# Altium PCB wisp5-form-factor-dipole.PcbDoc
Units mil, origin at the board's own origin, x right, y up, seen from the top; angles counter-clockwise.
Board outline 725 x 5829.89 mil, 4 copper layers (Top Layer, Mid-Layer 1, Mid-Layer 2, Bottom Layer); 43 components, 41 nets, 173 pads, 37 vias.
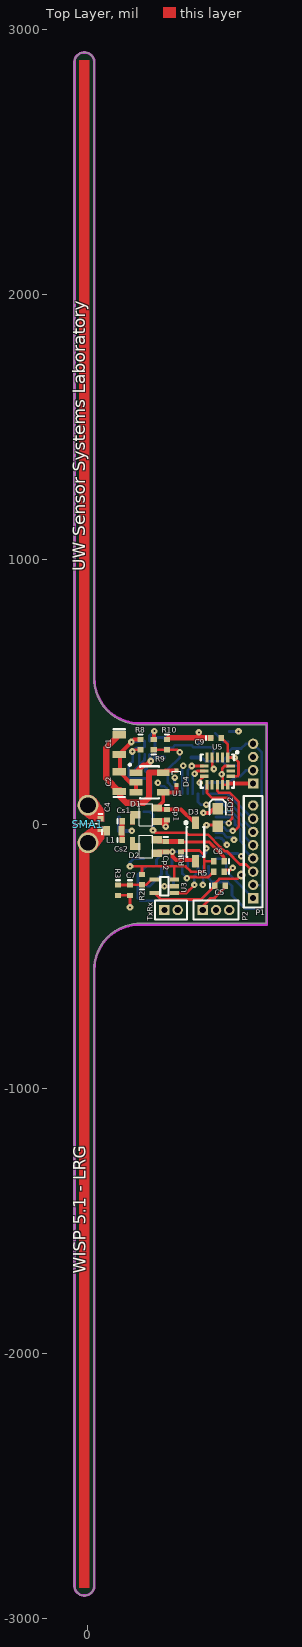
[diagram p0: Top Layer view]
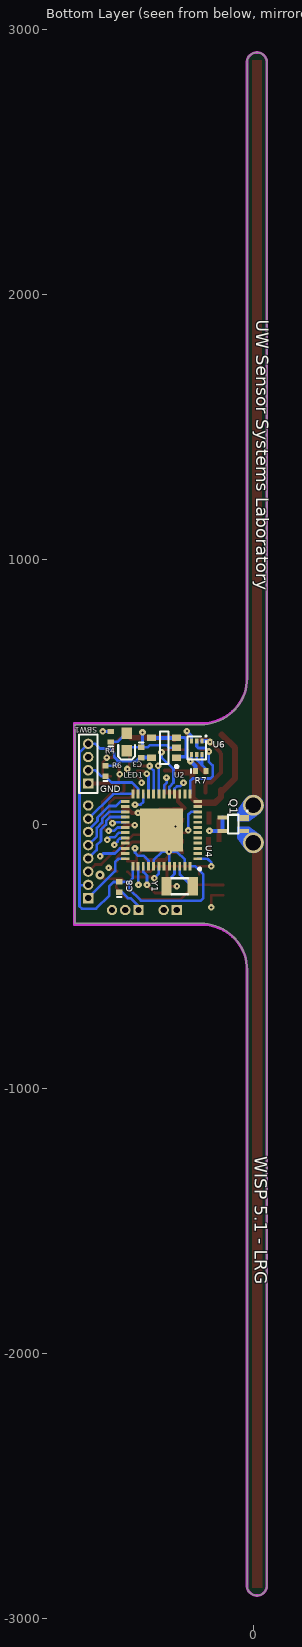
[diagram p1: Bottom Layer view, seen from below]
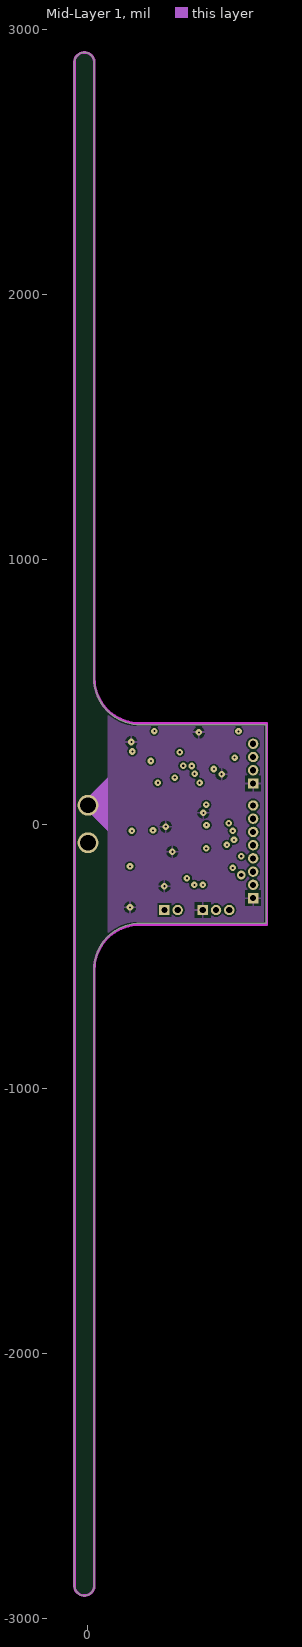
[diagram p2: Mid-Layer 1]
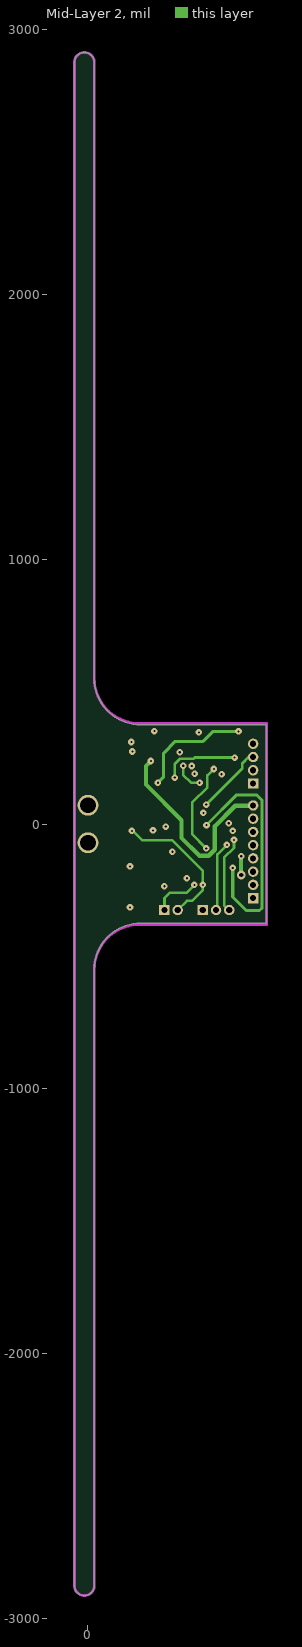
[diagram p3: Mid-Layer 2]

## Layer stack, top to bottom
Top Layer: signal copper 1.4
Dielectric: core 12.6, FR-4, Dk 4.8
Mid-Layer 1: signal copper 1.4
Dielectric: prepreg 12.6, FR-4, Dk 4.8
Mid-Layer 2: signal copper 1.4
Dielectric: core 12.6, FR-4, Dk 4.8
Bottom Layer: signal copper 1.4

## Board outline
-50,-2875 -50,2875 cw(c-12.5,2877.5) 25,2875 25,550 ccw(c200,550) 200,375 675,375 675,-375 200,-375 ccw(c200,-550) 25,-550 25,-2875 cw(c-12.5,-2877.5)

## Design rules (kind name [scope] priority, off if disabled: settings)
Clearance "Clearance~Sunstone Circuits" [All] p1: gap=6 // Sunstone Circuits Minimum Clearance Rule (MLB~4&6 Layer Designs)
HoleSize "HoleSize~Sunstone Circuits" [All] p1: absolutevalues=TRUE maxlimit=251 minlimit=8 maxpercent=80.000 minpercent=20.000 // Sunstone Circuits Hole Size Rule (MLB~4&6 Layer Designs)
HoleSize Testpoint [All] p2: absolutevalues=TRUE maxlimit=100 minlimit=1 maxpercent=80.000 minpercent=20.000
HoleSize TestPointUsage [All] p3: absolutevalues=TRUE maxlimit=100 minlimit=1 maxpercent=80.000 minpercent=20.000
MinimumAnnularRing "MinimumAnnularRing~Sunstone Circuits" [All] p1: minimumring=7 // Sunstone Circuits Minimum Annular Ring (MLB~4&6 Layer Designs)
MinimumSolderMaskSliver [All] p1 off: minsoldermaskwidth=2
PlaneClearance "PlaneClearance~Sunstone Circuits" [All] p1: clearance=12 // Sunstone Circuits Power Plane Clearance Rule (MLB~4&6 Layer Designs)
PlaneConnect "PlaneConnect~Sunstone Circuits" [All] p1: planeconnectstyle=Relief reliefexpansion=10 reliefentries=4 reliefconductorwidth=8 reliefairgap=10 // Sunstone Circuits Power Plane Connect Rule (MLB~4&6 Layer Designs)
PolygonConnect "PolygonConnect~Sunstone Circuits" [All] p1: connectstyle=Relief reliefconductorwidth=8 reliefentries=4 polygonreliefangle="90 Angle" airgapwidth=10 // Sunstone Circuits Polygon Connect Style (MLB~4&6 Layer Designs)
RoutingVias "RoutingVias~Sunstone Circuits" [All] p1: holewidth=16 width=30 viastyle="Through Hole" minholewidth=8 minwidth=24 maxholewidth=20 maxwidth=40 // Sunstone Circuits Routing Vias Rule (MLB~4&6 Layer Designs)
ShortCircuit "ShortCircuit~Sunstone Circuits" [All] p1: allowed=FALSE // Sunstone Circuits Short Circuit Rule~Do Not Allow (MLB~4&6 Layer Designs)
SilkToSilkClearance [All] p1 off: silktosilkclearance=10
SilkToSolderMaskClearance [IsPad] p1 off: minsilkscreentomaskgap=10 clearancetoexposedcopper=TRUE
SolderMaskExpansion "SolderMaskExpansion~Sunstone Circuits" [All] p1: expansion=3 // Sunstone Circuits Solder Mask Expansion Rule (MLB~4&6 Layer Designs)
ViasUnderSMD "ViasUnderSMD~Sunstone Circuits" [All] p1: allowed=FALSE // Sunstone Circuits Vias Under SMD~Do Not Allow (MLB~4&6 Layer Designs)
Width "Width~Sunstone Circuits" [All] p1: maxlimit=100 minlimit=6 preferedwidth=10 // Sunstone Circuits Minimum Width Rule (MLB~4&6 Layer Designs)
21 further rules are at their usual default settings.

## Classes and differential pairs
component class wisp-5-main: P1 P2
component class U_wisp-5-peripherals: C9 R7 R8 R9 R10 U5 U6
component class U_wisp-5-mcu: C8 LED1 LED2 R4 R5 R6 SBW1 TxRx U4 Y1
component class U_wisp-5-afe: 20 C1 C2 C3 C4 C5 C6 C7 Cp1 Cp2 Cs1 Cs2 D1 D2 D3 D4 L1 Q1 R1 R2 R3 SMA1 U1 U2 U3

## Components (designator, comment, footprint, x,y, rotation, side; value= is the part's Value field where it differs from the comment)
C1 "DNP" 0805 120,300 r270 top
C2 "Cap" 0805 120,160 r90 top
C3 "Cap" 0402 425,270 r270 bottom
C4 "Cap" 0402 48,0 r270 top
C5 "Cap" 0402 500,-233 r0 top
C6 "Cap" 0402 496,-141 r180 top
C7 "Cap" 0402 160,-250 r270 top
C8 "Cap" 0402 508,-238 r90 bottom
C9 "Cap" 0402 485,325 r0 top
Cp1 "Cap" 0402 300,35 r270 top
Cp2 "Cap" 0402 295,-86 r270 top
Cs1 "Cap" 0402 150,10 r0 top
Cs2 "Cap" 0402 150,-60 r0 top
D1 "HSMS-285C" "SOT-323, HSMS-285C" 220,35 r90 top
D2 "HSMS-285C" "SOT-323, HSMS-285C" 220,-85 r90 top
D3 "2.7V Zener" DIOD-SOD-123-2_V 407,-68 r90 top
D4 "RB751S40T1" SOD-523 335,175 r0 top
L1 "Ind" 0603 100,-25 r0 top
LED1 "LED" "Diode - 0603" 480,310 r90 bottom
LED2 "LED" "Diode - 0603" 491,25 r270 top
P1 "MHDR1X8" MHDR1X8 625,-280 r90 top
P2 "MHDR1X3" MHDR1X3 435,-325 r0 top
Q1 "BF1101WR" SOT343R 75,0 r90 bottom
R1 "Res" 0402 353,-86 r90 top
R2 "Res" 0402 205,-210 r90 top
R3 "Res" 0402 115,-250 r270 top
R4 "Res" 0402 540,330 r90 bottom
R5 "Res" 0402 496,-180 r180 top
R6 "Res" 0402 560,200 r90 bottom
R7 "Res" 0402 200,200 r180 bottom
R8 "Res" 0402 200,300 r270 top
R9 "Res" 0402 250,300 r90 top
R10 "Res" 0402 300,300 r270 top
SBW1 "4-Pin 0.05\" Pitch Female Rt Angle Header" MHDR1X4 625,153 r90 bottom
SMA1 "SMA - Hole - 2 Pin" "SMA - Hole - 2 Pin" 1,0 r180 top
TxRx "MHDR1X2" MHDR1X2 290,-325 r0 top
U1 "S-882Z24" SOT23-5 234,157 r270 top
U2 "TPS780330220DDCR" TI-DDC5_L 338,288 r0 bottom
U3 "Comparator" SC70-5 290,-235 r90 top
U4 "MSP430 Wolverine 48-Pin" MSP_QFN48_RGZ_PAD0 348,-23 r0 bottom
U5 "ADXL362" ADXL362 490,200 r270 top
U6 "SI1016X" "SC-89-6 Vishay" 215,288 r270 bottom
Y1 "XTAL" "XTAL [3.20mm x 1.50mm]" 280,-235 r180 bottom

## Footprints (in the part's own frame and the unit in brackets; to place one, negate y for a bottom-side part, rotate by r counter-clockwise, add the part's x,y. Pads: shape width x height; smd on the part's side, far side on the other; paste and mask are expansions set on the pad)
0402 [mm] "Surface Mount; Body 1 x 0.5 mm (LxW typ)"
  rect 0.5x0.6 smd: 1(-0.5,0) 2(0.5,0)
  silkscreen extent -0.95,-0.2 -0.95,0.2, body extent -0.5,-0.25 0.5,0.25, height 0.5
0603 [mm] "Surface Mount; Body 1.6 x 0.8 mm (LxW typ)"
  rect 0.6x0.9 smd: 1(-0.7,0) 2(0.7,0)
  silkscreen extent -1.17,-0.35 -1.17,0.35, body extent -0.8,-0.4 0.8,0.4, height 0.8
0805 [mm] "Surface Mount; Body 2.0 x 1.25 mm (LxW typ)"
  rect 0.7x1.3 smd: 1(-0.95,0) 2(0.95,0)
  silkscreen extent -1.48,-0.55 -1.48,0.55, body extent -1,-0.63 1,0.63, height 1.25
ADXL362 [mm]
  rect 0.925x0.3 smd: 1(-1.3,1) 2(-1.3,0.5) 3(-1.3,0) 4(-1.3,-0.5) 5(-1.3,-1) 9(1.3,-1) 10(1.3,-0.5) 11(1.3,0) 12(1.3,0.5) 13(1.3,1)
  rect 0.3x0.8 smd: 6(-0.5,-1.275) 7(0,-1.275) 8(0.5,-1.275) 14(0.5,1.275) 15(0,1.275) 16(-0.5,1.275)
  silkscreen extent -1.9,-1.6 1.6,2, body extent -1.5,-1.5 1.5,1.5, height 1.14
DIOD-SOD-123-2_V [mm] "SOD-123, 2-Leads, Body 2.85x1.7mm (max), Pitch 3.7mm"
  rect 1.2x0.7 smd: 1(-1.85,0) 2(1.85,0)
  silkscreen extent -1.43,-0.85 1.97,1.02, body extent -1.42,-0.85 1.43,0.85, height 1.45
"Diode - 0603" [mm] "Diode: Body 1.6 x 0.8 mm (LxW typ)"
  rect 1.1x1 smd: 1(0.85,0) 2(-0.85,0)
  silkscreen extent -1.7,-0.8 -0.3,0.8
MHDR1X2 [mm] "Connector; Header; 2 Position"
  rect 1x1 hole 0.6: 1(0,0)
  round 1 hole 0.6: 2(1.27,0)
  silkscreen extent -0.9,-0.9 2.17,0.9
MHDR1X3 [mm] "Connector; Header; 3 Position"
  rect 1x1 hole 0.6: 1(0,0)
  round 1 hole 0.6: 2(1.27,0) 3(2.54,0)
  silkscreen extent -0.9,-0.9 3.44,0.9
MHDR1X4 [mm] "Connector; Header; 4 Position"
  rect 1x1 hole 0.6: 1(0,0)
  round 1 hole 0.6: 2(1.27,0) 3(2.54,0) 4(3.81,0)
  silkscreen extent -0.9,-0.9 4.71,0.9
MHDR1X8 [mm] "Connector; Header; 8 Position"
  rect 1x1 hole 0.6: 1(0,0)
  round 1 hole 0.6: 2(1.27,0) 3(2.54,0) 4(3.81,0) 5(5.08,0) 6(6.35,0) 7(7.62,0) 8(8.89,0)
  silkscreen extent -0.9,-0.9 9.79,0.9
MSP_QFN48_RGZ_PAD0 [mm]
  rect 4.1x4.1 smd: 0(0,0)
  rect 0.85x0.28 smd: 1(-3.475,2.75) 2(-3.475,2.25) 3(-3.475,1.75) 4(-3.475,1.25) 5(-3.475,0.75) 6(-3.475,0.25) 7(-3.475,-0.25) 8(-3.475,-0.75) 9(-3.475,-1.25) 10(-3.475,-1.75) 11(-3.475,-2.25) 12(-3.475,-2.75) 25(3.475,-2.75) 26(3.475,-2.25) 27(3.475,-1.75) 28(3.475,-1.25) 29(3.475,-0.75) 30(3.475,-0.25) 31(3.475,0.25) 32(3.475,0.75) 33(3.475,1.25) 34(3.475,1.75) 35(3.475,2.25) 36(3.475,2.75)
  rect 0.28x0.85 smd: 13(-2.75,-3.475) 14(-2.25,-3.475) 15(-1.75,-3.475) 16(-1.25,-3.475) 17(-0.75,-3.475) 18(-0.25,-3.475) 19(0.25,-3.475) 20(0.75,-3.475) 21(1.25,-3.475) 22(1.75,-3.475) 23(2.25,-3.475) 24(2.75,-3.475) 37(2.75,3.475) 38(2.25,3.475) 39(1.75,3.475) 40(1.25,3.475) 41(0.75,3.475) 42(0.25,3.475) 43(-0.25,3.475) 44(-0.75,3.475) 45(-1.25,3.475) 46(-1.75,3.475) 47(-2.25,3.475) 48(-2.75,3.475)
  silkscreen extent -3.78,3.63 -3.55,3.85, body extent -3.3,-3.3 3.3,3.3, height 1
SC70-5 [mm] "SC70-5"
  rect 0.4x0.92 smd: 1(-0.65,-0.95) 2(0,-0.95) 3(0.65,-0.95) 4(0.65,0.95) 5(-0.65,0.95)
  silkscreen extent -0.9,-0.4 0.9,0.4
"SC-89-6 Vishay" [mm]
  rect 0.478x0.3 smd: 1(-0.638,0.5) 2(-0.638,0) 3(-0.638,-0.5) 4(0.638,-0.5) 5(0.638,0) 6(0.638,0.5)
  silkscreen extent -1.15,-0.87 1.11,0.91
"SMA - Hole - 2 Pin" [mm] "SMA port for wisp"
  round 2 hole 1.5: 1(0,1.796) 2(0,-1.796)
  silkscreen extent -1.02,0 1.02,0
SOD-523 [mm] "SOD-523 Footprint"
  rect 0.4x0.4 smd: 1(0,0.7) 2(0,-0.7)
  silkscreen extent -0.4,0.3 0.4,0.6, body extent -0.4,-0.6 0.4,0.6, height 1
SOT23-5 [mm] "SOT23-5"
  rect 0.62x1.22 smd: 1(-0.95,-1.31) 2(0,-1.31) 3(0.95,-1.31) 4(0.95,1.31) 5(-0.95,1.31)
  silkscreen extent -1.8,-2 1.55,0.9, body extent -1.55,-0.9 1.55,0.9, height 1
SOT343R [mm] "SOT343R - Package for BF1101WR"
  rect 0.6x0.92 smd: 1(0.584,-1.016)
  rect 0.4x0.92 smd: 2(-0.664,-1.007) 3(-0.664,1.093) 3(0.636,1.093)
  silkscreen extent -0.91,-1.3 1.27,0.54
"SOT-323, HSMS-285C" [mm] "SOT-323/SC-70; 3 Leads; HSMS-285C"
  rect 0.7x1 smd: 1(-0.65,-1.025) 2(0.65,-1.025) 3(0,1.025)
  silkscreen extent -1.07,-0.65 1.07,0.65, body extent -1.07,-0.65 1.07,0.65, height 1
TI-DDC5_L [mm] "SOT23, 5-Leads, Body 2.9x1.6mm, Pitch 0.95mm, IPC High Density"
  rect 0.85x0.6 smd: 1(-1.2,0.95) 2(-1.2,0) 3(-1.2,-0.95) 4(1.2,-0.95) 5(1.2,0.95)
  silkscreen extent -1.32,-1.55 0.4,1.92, body extent -0.87,-1.52 0.87,1.53, height 1.1
"XTAL [3.20mm x 1.50mm]" [mm] "FC-135   crystal - epson eletronics"
  rect 1x1.8 smd: 1(-1.25,0) 2(1.25,0)
  silkscreen extent -0.76,-0.76 0.76,0.76

## Part data
C1: library part Cap, "Ceramic Capacitor (Surface Mount)"
C2 C3 C4 C5 C6 C7 C8 C9 Cp1 Cp2 Cs1 Cs2: "Ceramic Capacitor (Surface Mount)"
D1 D2: "Agilent Schottky Diode, Two in Series, Small Package SOT-323"
D3: library part CMP-0303-00003-1, "1.0 A Surface Mount Schottky Barrier Rectifier, 40 V, -65 to 125 degC, 2-Pin SOD-123 Package, RoHS, Tape and Reel"
D4: "Schottky Diode"
L1: "Inductor (Surface Mount)"
LED1 LED2: library part "Diode - LED", "Typical RED, GREEN, YELLOW, AMBER GaAs LED"
P1: "Header, 8-Pin"
P2: "Header, 3-Pin"
Q1: "N-Channel Dual-Gate Mos-Fets MOSFET, SOT343R"
R1 R2 R3 R4 R5 R6 R7 R8 R9 R10: "Chip Resistor (Surface Mount)"
SBW1: library part MHDR1X4, "Header, 4-Pin"
SMA1: "Two pin SMA connector wisp"
TxRx: "Header, 2-Pin"
U1: library part S-882Zxx, "ULTRA-LOW VOLTAGE OPERATION CHARGE PUMP IC  FOR STEP-UP DC-DC CONVERTER STARTUP"
U2: library part CMP-0394-01119-1, "Single Output LDO, 150 mA, Adjustable 1.22 to 5.25 V Output, 2.2 to 5.5 V Input, with 500 nA Quiescent Current, 5-pin SOT (DDC), -40 to 125 degC, Green (RoHS & no Sb/Br)"
U3: library part NCS2200, "Comparator: On Semi 10uA Comparator"
U4: library part MSP430FR596X_586X_RGZ, "16-bit FRAM MCU"
U5: "Analog Devices low power accelerometer"
U6: "NMOS and PMOS array"
Y1: library part "XTAL 2-pins", "Crystal Oscillator - [3.20mm x 1.50mm]"

## Via types
v1: diameter 25, hole 8, Top Layer to Bottom Layer, tented both sides, 36 vias
v2: diameter 33, hole 16, Top Layer to Bottom Layer, tented both sides, 1 vias

## Nets (pads, with @x,y where several pads share a name; then routed paths per layer and width w, separated by ;. In a path a pad name is that pad's centre, name@x,y a point inside that pad or via, vN(x,y) a via of type N, cw(c..) or ccw(c..) an arc to the next point about the centre after c; other vN are vias at no path point)
ACCEL_CS: U4.19 U5.8 | length 247.2
  Top Layer w10: v1(423,156) 423,163.51 U5.8
  Mid-Layer 2 w10: v1(361,220) 361,186 391,156 v1(423,156)
  Bottom Layer w10: U4.19 357.84,216.84 v1(361,220)
ACCEL_EN: C9.2 U4.18 U5.1 U5.14 | length 568
  Top Layer w10: C9.2 529.37,300.31 U5.1 529.55,251 v1(555,251) 555,248.54 570,233.54 570,185 565.32,180.32 U5.14
  Mid-Layer 2 w10: v1(329,175) 329,227 348.5,246.5 400.5,246.5 405,251 v1(555,251)
  Bottom Layer w10: v1(329,175) 328,175 328,156 338.16,145.84 U4.18
ACCEL_INT1: U4.30 U5.11 | length 322.8
  Top Layer w10: U5.11 490,125 497,118 537,118 571,84 571,-10 555,-26 v1(548,-26)
  Bottom Layer w10: U4.30 514.16,-13.16 527,-26 v1(548,-26) 542.62,-20.62 v1@541.73,-21.5
ACCEL_INT2: U4.29 U5.9 | length 274.8
  Top Layer w10: U5.9 450.63,117.37 469,99 526.37,99 546,79.37 546,21 533,8 v1(533,3)
  Bottom Layer w10: U4.29 526.47,6.53 531,2 532,2 v1(533,3)
ACCEL_MISO: U4.21 U5.7 | length 119.2
  Top Layer w10: v1(404,190) 414,200 U5.7
  Bottom Layer w10: U4.21@397,114.02 U4.21 397.21,183.21 v1(404,190)
ACCEL_MOSI: U4.20 U5.6 | length 153.7
  Top Layer w10: v1(393,219) 434.12,219 U5.6@434.8,219.69
  Bottom Layer w10: U4.20 377.53,201.88 393,217.35 v1(393,219)
ACCEL_SCLK: U4.40 U5.4 | length 503.4
  Top Layer w10: U5.4 470.32,214.68 v1(477,208)
  Mid-Layer 2 w10: v1(448,-92) 394.5,-38.5 394.5,80.5 452,138 452,183 v1(477,208)
  Bottom Layer w10: U4.40 397.21,-137.79 415,-120 436,-120 448,-108 v1(448,-92)
ANT: C4.2 L1.1 Q1.2 SMA1.1
AUX_1: P1.5 U4.27 | length 226.4
  Bottom Layer w10: U4.27 545.96,45.9 572.5,19.36 572.5,5.36 592.5,-14.64 592.5,-47.5 P1.5 ; P1.5@626,-81 P1.5@626,-74.4
AUX_2: P1.4 U4.28 | length 250.6
  Bottom Layer w10: U4.28@484.81,26.5 542.73,26.5 556.5,12.73 556.5,-2.5 557.73,-2.5 576.5,-21.27 576.5,-63.5 593,-80 593,-98 P1.4@626,-131
AUX_3: P1.3 U4.10 | length 543.7
  Top Layer w10: v1(247,-24) 256.5,-33.5 373.5,-33.5 380,-40 454.42,-40 502.5,-88.08 502.5,-88.73 516.27,-102.5 525.39,-102.5 575.89,-153 598,-153 P1.3@626,-181
  Bottom Layer w10: U4.10 236.1,45.9 247,35 v1(247,-24)
AUX_I2C_SCL: P2.2 U4.32 | length 320.4
  Mid-Layer 2 w10: P2.2@484,-327 490,-321 490,-115 v1(526,-79)
  Bottom Layer w10: U4.32 499.53,-52.53 501.7,-54.7 506.51,-54.7 513.54,-61.73 513.54,-66.54 v1(526,-79)
AUX_I2C_SDA: P2.3 U4.31 | length 369.5
  Mid-Layer 2 w10: P2.3@534,-327 515.68,-308.68 515.68,-127.32 553,-90 v1(553,-60)
  Bottom Layer w10: U4.31 508.7,-32.84 526.36,-50.5 543.5,-50.5 v1(553,-60)
AUX_UART_RX: P1.6 U4.25 | length 205.2
  Bottom Layer w10: U4.25 502.93,85.27 520.19,68 546.49,68 590,24.49 590,11.6 626,-24.4 625,-25.4 P1.6 P1.6@625,-35
AUX_UART_TX: P1.7 U4.24 | length 208.4
  Bottom Layer w10: U4.24 529.19,113.81 P1.7@625,18
BITLINE: C6.2 R1.1 R2.2 U3.3 U4.1 | length 631.9
  Top Layer w10: v1(160,-160) 205,-160 ; R2.2 205,-160 ; U3.3 327.4,-160 ; R1.1 358.68,-100 422,-100 441,-119 441,-174 435,-180 390,-180 370,-160 205,-160 ; 441,-141 C6.2
  Bottom Layer w10: v1(160,-160) 160,-145 173.73,-131.27 U4.1
BITLINE_LPF: C7.1 R2.1 R3.1 U3.4 | length 146
  Top Layer w10: R3.1 C7.1 ; C7.1@160,-229.68 220.32,-229.68 240.59,-209.41 U3.4
CPOUT: C1.1 C2.1 D4.1 U1.5 | length 608.7
  Top Layer w15.75: U1.5 293.73,202.56 D4.1
  Top Layer w23.62: C2.1 70,172.6 70,287.4 C1.1 ; C2.1@123,127.53 123,103 146,80 212,80 231.4,99.4 231.4,194.4 U1.5
GND: C1.2 C2.2 C3.1 C4.1 C5.2 C7.2 C8.1 C9.1 Cp1.2 Cp2.2 D1.1 D2.1 D3.1 LED1.2 LED2.2 P1.1 P2.1 Q1.1 R3.2 R8.1 R10.1 SBW1.1 SMA1.2 U1.2 U1.3 U2.2 U3.2 U4.0 U4.36 U4.41 U4.44 U4.47 U5.12 U5.13 U5.16 U6.1 | length 2012.4
  Top Layer w10: R3.2 C7.2 v1(160,-315) ; v1(290,-235) U3.2 ; P2.1@434,-327 434,-311 465,-280 480,-280 519.69,-240.31 C5.2 ; v1@504.69,185.31 501,189 508.45,196.45 508.45,210.46 516.99,219 U5.16@530.32,219 ; v1(506,188) 509.69,184.31 U5.12 U5.13
  Top Layer w15: C1.2@125,266.77 125,266.54 123,264.54 123,194.46 160.46,157 U1.2 U1.3 ; C1.2@127.44,272.44 v1(165,310) 174.69,319.69 R8.1 ; Cp2.2@295,-104.69 319.69,-104.69 v1(320,-105) 320,-122 334,-136 402.22,-136 D3.1@409.19,-129.03 ; v1(437,42) 460,42 476.46,58.46 LED2.2 ; U5.13 533.55,153 SBW1.1
  Top Layer w19.68: R10.1 R10.1@306.31,326 ; C9.1@464.32,326 C9.1
  Top Layer w21.65: R10.1@306.31,326 420,326 ; v1(420,346) 420,326 ; C9.1@464.32,326 420,326
  Bottom Layer w10: U2.2 320,288 329.69,297.69 392.31,297.69 400.32,289.69 C3.1@419.69,289.69 ; U4.44 v1@318.47,-106.53 ; v1(320,-105) 347,-105 377.53,-135.53 U4.41 ; v1(420,346) 420,289.69 466.85,289.69 475,281.54 LED1.2@475,270 ; P2.1 435,-310 465,-280 475,-280 497.32,-257.68 C8.1
  Bottom Layer w10.24: U4.47@260.09,-159.14 260.09,-134.91 290,-105 v1(320,-105) ; U4.36 510.27,-131.27 523,-144 523,-178 P1.1 P1.1@626,-281
  Bottom Layer w15: v1@168.12,313.12 U6.1
  other v1: 295,-10
LED1: R4.2 U4.16 | length 535.5
  Mid-Layer 2 w12: v1(265,156) 287,178 287,268 331,312 436,312 474,350 v1(570,350)
  Bottom Layer w10: v1(265,156) 278.46,142.54 289.59,142.54 298.79,133.34 U4.16 ; R4.2@535,349.69 v1@569.69,349.69
LED2: R5.2 U4.42 | length 164
  Top Layer w10: v1(375,-205) 380,-200 456.31,-200 R5.2
  Bottom Layer w10: U4.42 357.84,-187.84 v1(375,-205)
NetC6_1: C6.1 Cp2.1 D2.2 R1.2 | length 258.1
  Top Layer w11.81: R1.2@354.28,-67.59 458.11,-67.59 472.41,-81.89 472.41,-82.72 515.69,-126 C6.1
  Top Layer w19.68: Cp2.1@296,-66.31 R1.2
NetCs1_1: Cs1.1 Cs2.1 L1.2
NetCs1_2: Cs1.2 D1.3
NetCs2_2: Cs2.2 D2.3
NetLED1_1: LED1.1 R4.1 | length 62.2
  Bottom Layer w10: LED1.1@481.54,343.46 514.69,310.32 R4.1@530,310.32
NetLED2_1: LED2.1 R5.1 | length 1000.1
  Top Layer w11.81: v1(449,-4) 486.54,-4 LED2.1 ; R5.1 521.68,-174 540,-174 v1(548,-166)
  Mid-Layer 2 w11.81: v1(449,-4) 563,110 638,110 659,89 659,-317 649,-327 599,-327 548,-276 v1(548,-166)
NetR7_2: R7.2 U6.5 U6.6 | length 118
  Bottom Layer w10: R7.2 180.31,207.31 195.32,222.32 ; U6.6 195.32,222.32 ; U6.5@215.5,262.88 215.5,249.15 214.5,248.15 214.5,241.5 195.32,222.32
NetR9_2: R9.2 U6.3 | length 77.2
  Top Layer w10: v1@250,349 v1(252,351)
  Top Layer w15: R9.2 v1@250,349
  Bottom Layer w12: U6.3 234.69,333.69 v1(252,351)
NetU4_45: U4.45 Y1.1 | length 85.7
  Bottom Layer w10: U4.45 298.79,-188.79 324.21,-214.21 Y1.1@324.21,-235
NetU4_46: U4.46 Y1.2 | length 102.7
  Bottom Layer w10: Y1.2@225.79,-235 235,-235 279.1,-190.9 U4.46
RST: R6.1 SBW1.2 U4.23 | length 236.9
  Bottom Layer w10: U4.23 436.58,133.58 460,157 536.69,157 R6.1 575.32,180.32 598,203 SBW1.2
RX: TxRx.1 U3.1 U4.39 | length 342.9
  Top Layer w10: U3.1 372.41,-260.59 v1(403,-230)
  Mid-Layer 2 w10: TxRx.1 290,-280 310,-260 373,-260 v1(403,-230)
  Bottom Layer w10: v1(403,-230) 403,-195.36 416.9,-181.46 U4.39
RX_EN: C5.1 U3.5 U4.34 | length 558.6
  Top Layer w10: U3.5 277.01,-285 428.32,-285 C5.1 480.32,-224.68 498,-207 566,-207 v2(580,-193)
  Mid-Layer 2 w15: v2(580,-193) v1(580,-122)
  Bottom Layer w10: U4.34 504.9,-91.9 524.5,-111.5 567.5,-111.5 v1@579,-123
TEST: SBW1.3 U4.22 | length 329.3
  Mid-Layer 2 w10: v1(448,73) 584,209 584,229 608,253 SBW1.3
  Bottom Layer w10: U4.22 416.9,83.1 427,73 v1(448,73)
TX: Q1.3 TxRx.2 U4.38 | length 704.8
  Mid-Layer 2 w10: v1(166.86,-26.14) 169,-24 206,-61 318,-61 435,-178 v1(435,-230) 435,-250 395,-290 375,-290 TxRx.2
  Bottom Layer w10: v1(435,-230) 436.58,-228.42 U4.38
  Bottom Layer w15.75: Q1.3@118.02,25.04 118.02,-26.14 v1(166.86,-26.14) v1@169,-24
VBOOST: P1.8 R7.1 U1.1 U2.1 U2.3 U2.4 U6.4 | length 1179.5
  Top Layer w20: U1.1 210.93,222.9 223.9,222.9 v1(239,238)
  Mid-Layer 2 w15.75: v1(239,238) 220,219 220,149 355,14 355,-53 422,-120 457.3,-120 480,-97.3 480,-8.69 557.7,69 P1.8@626,69
  Bottom Layer w11.81: v1@234.69,242.31 U6.4
  Bottom Layer w12: v1(239,238) 254.69,253.69 254.69,253.91 ; U2.3@285.76,326.4 260.4,326.4 254.69,320.69 254.69,253.91 ; U2.1 287.45,253.91 254.69,253.91
  Bottom Layer w15: R7.1 219.69,218.69 v1(239,238) ; U2.3 U2.4
VMEAS_ENABLE: R8.2 U4.13 U6.2 | length 349
  Top Layer w10: v1(169,274) 175.31,280.31 R8.2
  Bottom Layer w10: v1(169,274) 170,273 170,236.34 155,221.34 155,180 163,172 230,172 240,162 239.73,161.73 U4.13
  Bottom Layer w12: v1(169,274) 182,287 209,287 215,293 U6.2
VMEAS_OUT: R9.1 R10.2 U4.17 | length 291.1
  Top Layer w10: R9.1 338.69,280.31 v1(348,271) v1@348,264
  Bottom Layer w10: U4.17 318.47,140.53 303,156 303,207 348,252 v1(348,271)
VRECT: Cp1.1 D1.2 D3.2 D4.2 U1.4 | length 279.4
  Top Layer w15: D1.2 285.58,85.81 U1.4 335,119.6 D4.2 ; Cp1.1@295,54.69 Cp1.1 352.87,54.69 402.72,4.83 D3.2
VREG: C3.2 C8.2 P1.2 R6.2 SBW1.4 U2.5 U4.37 U4.48 | length 1802.9
  Bottom Layer w10: U4.48 220.19,-159.81 190,-190 190,-279.89 199.68,-289.57 425.43,-289.57 470.31,-244.69 470.31,-218.31 ; C3.2@420,250.31 431,250.31 444.27,237.04 509.65,237.04 ; U4.37 456.27,-204.27 470.31,-218.31 ; 494.5,-219 529,-219 545,-235 545,-270 595,-320 649,-320 658,-311 658,-231 ; C8.2 470.31,-218.31 ; R6.2 527,219.69 509.65,237.04 ; P1.2@626,-231 658,-231 ; 509.65,237.04 526.66,254.05 526.66,266.66 545,285 580,285 598,303 SBW1.4 658,270 658,-231
  Bottom Layer w15: U2.5@392.96,251.31 419,251.31 C3.2@420,250.31
pads on no net: U4.2 U4.3 U4.4 U4.5 U4.6 U4.7 U4.8 U4.9 U4.11 U4.12 U4.14 U4.15 U4.26 U4.33 U4.35 U4.43 U5.2 U5.3 U5.5 U5.10 U5.15

## Polygon pours and split planes (outlines as drawn)
GND on Mid-Layer 1 "GND" (solid, pour order 4): 0,100 75,175 75,425 200,375 675,375 675,-375 200,-375 75,-425 75,-25 0,50 0,70.71

## Keep-outs
Keep-Out Layer:
  lines w10: 194.29,-381 677,-381 677,381 194.29,381 ; 194.29,-380.64 ccw(c194.29,-549.93) 25,-549.93 25,-2875 cw(c-12.5,-2877.5) -50,-2875 -50,1437.5 -50,2875 cw(c-12.5,2877.5) 25,2875 25,550 ccw(c194.29,550) 194.29,380.71

## Other copper
Top Layer:
  rectangle net GND: 263,6 307,23
  rectangle net GND: 263,-114 307,-97
  rectangle net NetC6_1: 264,-73 307,-56
  rectangle net NetCs2_2: 160.35,-98 179.35,-50
  rectangle net NetCs1_2: 160,-1 179,47
  rectangle net NetCs1_1: 121,-68 140,20
  rectangle net GND: -32.37,55 7,2886.76
  region net ANT: 6.37,-55 -33,-55 -33,-2886.76 6.37,-2886.76
  rectangle net VRECT: 264,47 307,64
  region net GND: 32,95 62,52.77 62,10 17,10 -25,41 -38,66 -32,92 -18,104 0,110 18,106
  region net GND: 305,-10 305,20 260,20 285,-10
  region net ANT: 32,-95.5 62,-53.27 62,-10.5 17,-10.5 -25,-41.5 -38,-66.5 -32,-92.5 -18,-104.5 0,-110.5 18,-106.5
Mid-Layer 1:
  region net GND: 75,-25 0,50 0,100 75,175
Bottom Layer:
  region net ANT: 32,-95.5 62,-53.27 62,-10.5 17,-10.5 -25,-41.5 -38,-66.5 -32,-92.5 -18,-104.5 0,-110.5 18,-106.5
  region net GND: 32,95 62,52.77 62,10 17,10 -25,41 -38,66 -32,92 -18,104 0,110 18,106

## Silkscreen, mask and mechanical layers (free items; w line width, h text height)
Top Overlay:
  text "UW Sensor Systems Laboratory" at 7,955 h80 r90
  text "WISP 5.1 - LRG" at 10,-1700 h80 r90
Bottom Overlay:
  text "UW Sensor Systems Laboratory" at 7,1905 h80 r90
  text "GND" at 580,120 h25
  text "WISP 5.1 - LRG" at 13,-1256 h80 r90